# EAGLE board Rauchmelder_v3.9.0 (EAGLE 9.6.2)
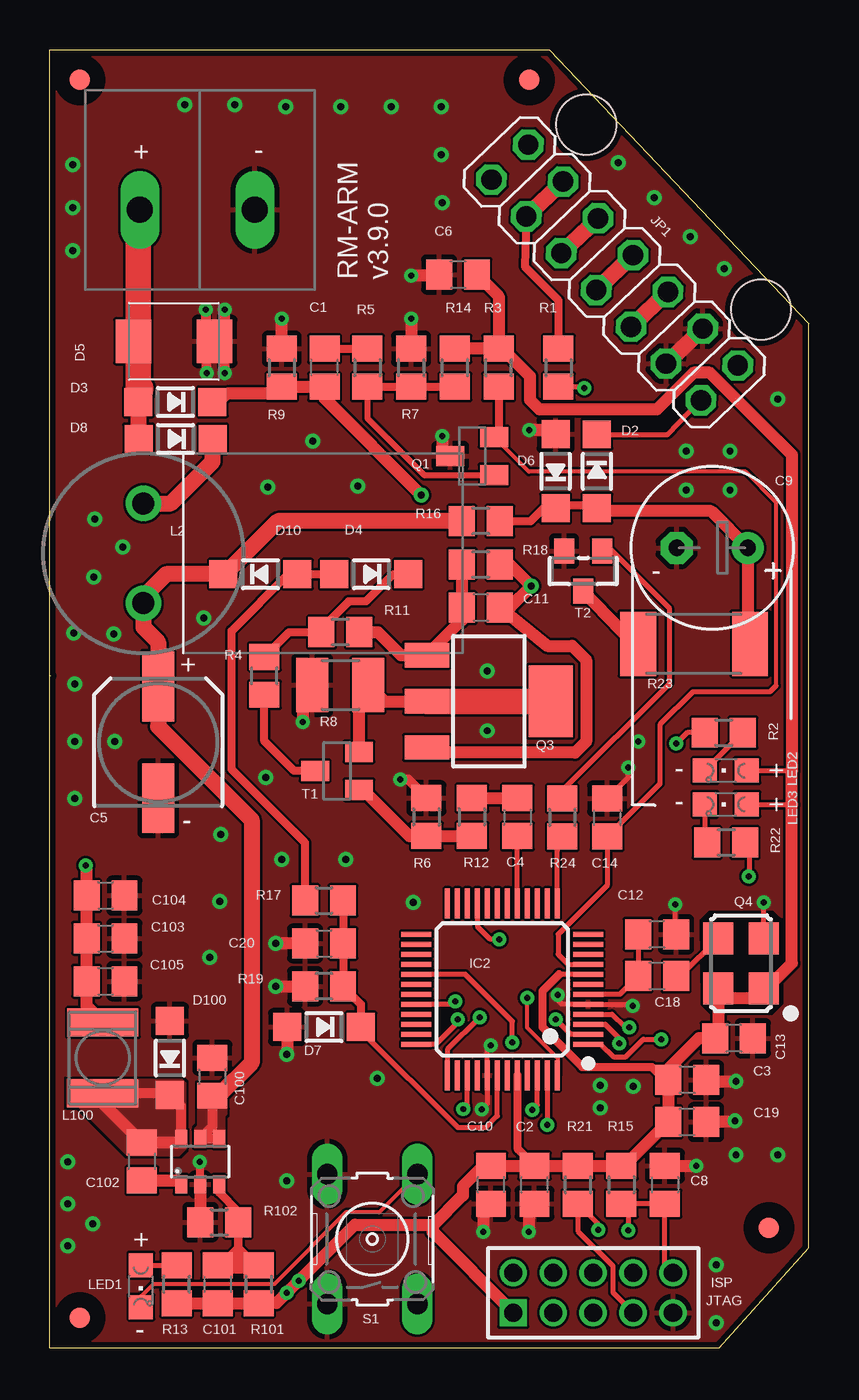
[diagram p0: board, top side]
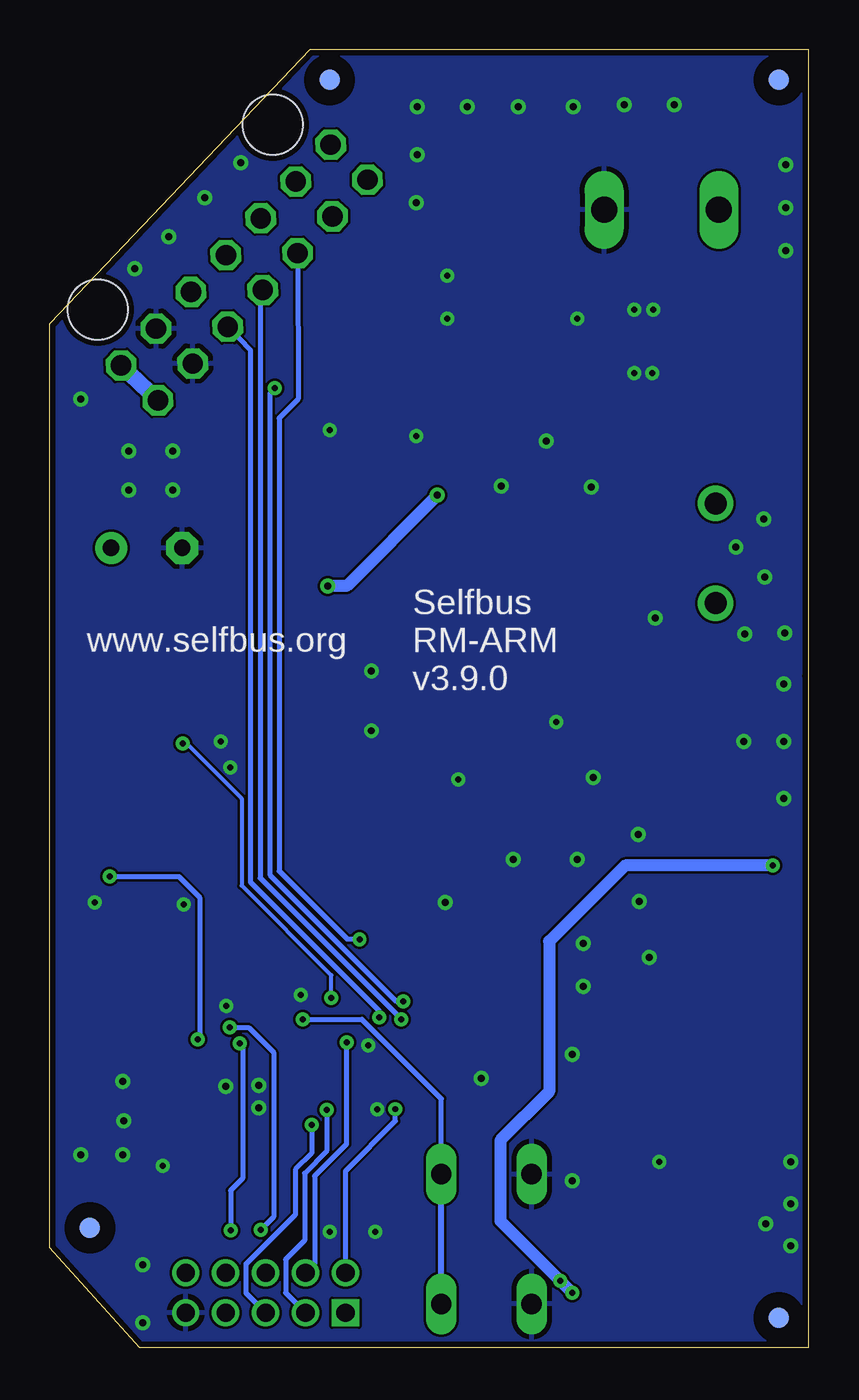
[diagram p1: board, bottom side, seen from below]

Size 38 x 65 mm. Coordinates in mm from the lower left corner, seen from the top.
Outline: 0,33.66 0.04,33.66
Outline: 0,0 0,65 25,65 38,51.3 38,5 33.5,0 0,0
Copper layers (1*16): Top 0.035mm / dielectric 1.5mm / Bottom 0.035mm
Design rules "aisler_2_layer_complex": minimum track width 0.125mm, minimum drill 0.2mm, track to track 0.125mm, track to pad 0.125mm, pad to pad 0.125mm, via to via 0.125mm, smd to smd 0.125mm, copper to edge 0.3mm, drill to drill 0.25mm, minimum pad ring 0.2mm, minimum via ring 0.2mm, stop-mask expansion 0mil, vias tented up to drill 0mil, thermal gap 10mil
Holes 3 mm at 26.85,61.25 35.6,52
tRestrict: area 32.5,16.7 to 36.7,21.9

## Footprints (pad centres in the part's own frame; a part is rotated, then mirrored left to right if it is on the bottom)
C0805 = smd 1.3 x 1.5: 1 -0.95,0; 2 0.95,0
SANYO-OSCON_SMD_C6 = smd 3.5 x 1.6: + 2.8,0; - -2.8,0
E3,5-8 = drill 0.813 pad 1.6: + -1.778,0 | drill 0.813 pad 1.6 octagon: - 1.778,0
SOD-123 = smd 1.4 x 1.4: A 1.85,0; C -1.85,0
SMBJ = smd 1.78 x 2.16: A 2.04,0; C -2.03,0
FID_040 = smd 1.016 x 1.016 bottom: FIDB 0,0 | smd 1.016 x 1.016: FIDT 0,0
LQFP48 = smd 1.5 x 0.25: 1 -4.3,2.75; 2 -4.3,2.25; 3 -4.3,1.75; 4 -4.3,1.25; 5 -4.3,0.75; 6 -4.3,0.25; 7 -4.3,-0.25; 8 -4.3,-0.75; 9 -4.3,-1.25; 10 -4.3,-1.75; 11 -4.3,-2.25; 12 -4.3,-2.75; 25 4.3,-2.75; 26 4.3,-2.25; 27 4.3,-1.75; 28 4.3,-1.25; 29 4.3,-0.75; 30 4.3,-0.25; 31 4.3,0.25; 32 4.3,0.75; 33 4.3,1.25; 34 4.3,1.75; 35 4.3,2.25; 36 4.3,2.75 | smd 0.25 x 1.5: 13 -2.75,-4.3; 14 -2.25,-4.3; 15 -1.75,-4.3; 16 -1.25,-4.3; 17 -0.75,-4.3; 18 -0.25,-4.3; 19 0.25,-4.3; 20 0.75,-4.3; 21 1.25,-4.3; 22 1.75,-4.3; 23 2.25,-4.3; 24 2.75,-4.3; 37 2.75,4.3; 38 2.25,4.3; 39 1.75,4.3; 40 1.25,4.3; 41 0.75,4.3; 42 0.25,4.3; 43 -0.25,4.3; 44 -0.75,4.3; 45 -1.25,4.3; 46 -1.75,4.3; 47 -2.25,4.3; 48 -2.75,4.3
SOT23-6 = smd 0.6 x 0.9: 1 -0.95,-1.15; 2 0,-1.15; 3 0.95,-1.15; 4 0.95,1.15; 5 0,1.15; 6 -0.95,1.15
2X07 = drill 1.016 octagon: 1 -7.62,-1.27; 2 -7.62,1.27; 3 -5.08,-1.27; 4 -5.08,1.27; 5 -2.54,-1.27; 6 -2.54,1.27; 7 0,-1.27; 8 0,1.27; 9 2.54,-1.27; 10 2.54,1.27; 11 5.08,-1.27; 12 5.08,1.27; 13 7.62,-1.27; 14 7.62,1.27
2X05M = drill 0.914 square: 1 -4,-1 | drill 0.914: 2 -4,1; 3 -2,-1; 4 -2,1; 5 0,-1; 6 0,1; 7 2,-1; 8 2,1; 9 4,-1; 10 4,1
11P-L1 = drill 1.1 pad 1.778: 1 -2.5,0; 2 2.5,0
L4532P = smd 1.397 x 3.556: 1 -1.778,0; 2 1.778,0
CHIPLED_0805 = smd 1.2 x 1.2: A 0,-1.05; C 0,1.05
SOT23-BEC = smd 1 x 1.4: B -0.95,-1.1; C 0,1.1; E 0.95,-1.1
SOT223 = smd 1.219 x 2.235: 1 -2.311,-3.099; 2 0,-3.099; 3 2.311,-3.099 | smd 3.6 x 2.2: 4 0,3.099
ASF = smd 1.6 x 1.5: 1 -1.25,-1.15; 2 1.25,-1.15; 3 1.25,1.15; 4 -1.25,1.15
R0805 = smd 1.3 x 1.5: 1 -0.95,0; 2 0.95,0
R1210 = smd 1.6 x 2.7: 1 -1.4,0; 2 1.4,0
R2512 = smd 1.8 x 3.2: 1 -2.8,0; 2 2.8,0
B3F-10XX = drill 1.016 long: 1 -3.251,2.261; 2 3.251,2.261; 3 -3.251,-2.261; 4 3.251,-2.261
SOT23 = smd 1 x 1.4: 1 -0.95,-1.1; 2 0.95,-1.1; 3 0,1.1
SOT23-WIDE = smd 1 x 1.27: 1 -0.95,-1; 2 0.95,-1; 3 0,1
BUSKLEMME243-724 = drill 1.3 long: 1 -2.875,0; 2 2.875,0

## Placement (x,y rotation side)
C1  100nF  [C0805]  13.75,49.08 90 top
C2  1uF  [C0805]  24.26,8.16 90 top
C3  100nF  [C0805]  31.91,13.41 180 top
C4  10nF  [C0805]  23.4,26.57 270 top
C5  100uF  [SANYO-OSCON_SMD_C6]  5.42,30.32 90 top
C6  100nF  [C0805]  20.43,53.75 0 top
C8  10nF  [C0805]  30.79,8.16 270 top
C9  330uF  [E3,5-8]  33.16,40.06 180 top
C10  100nF  [C0805]  22.08,8.16 90 top
C11  10nF  [C0805]  21.58,37.06 180 top
C12  220pF  [C0805]  30.4,20.7 180 top
C13  10nF  [C0805]  34.25,15.5 180 top
C14  100pF  [C0805]  27.9,26.55 270 top
C18  100pF  [C0805]  30.4,18.61 180 top
C19  1uF  [C0805]  31.9,11.3 180 top
C20  100nF  [C0805]  13.72,20.25 0 top
C100  4.7uF 50V  [C0805]  8.13,13.58 270 top
C101  470nF  [C0805]  8.4,3.18 270 top
C102  15nF  [C0805]  4.6,9.33 270 top
C103  47uF 10V  [C0805]  2.78,20.5 0 top
C104  100nF  [C0805]  2.78,22.65 0 top
C105  47uF 10V  [C0805]  2.78,18.35 0 top
D2  BAT46  [SOD-123]  27.39,43.9 270 top
D3  1N4148  [SOD-123]  6.28,47.37 180 top
D4  1N4148  [SOD-123]  16.09,38.74 180 top
D5  SMAJ40  [SMBJ]  6.21,50.4 0 top
D6  12V  [SOD-123]  25.32,43.9 90 top
D7  DDZ9685  [SOD-123]  13.72,16.06 180 top
D8  1N4148  [SOD-123]  6.29,45.51 180 top
D10  7V5  [SOD-123]  10.53,38.74 0 top
D100  RB060M-60  [SOD-123]  6.01,14.51 90 top
FD1  FID_40MIL  [FID_040]  1.5,63.5 0 top
FD2  FID_40MIL  [FID_040]  36,6 0 top
FD3  FID_40MIL  [FID_040]  24,63.5 0 top
FD4  FID_40MIL  [FID_040]  1.5,1.5 0 top
IC2  LPC1115  [LQFP48]  22.65,17.95 180 top
IC100  BD9G101  [SOT23-6]  7.52,9.32 0 top
JP1  [2X07]  28.27,53.85 133.5 top
JTAG  J  [2X05M]  27.2,2.75 0 top
L2  150mH  [11P-L1]  4.67,39.79 270 top
L100  4.7uH  [L4532P]  2.65,14.51 90 top
LED1  [CHIPLED_0805]  4.55,3.08 180 top
LED2  [CHIPLED_0805]  33.84,28.9 90 top
LED3  [CHIPLED_0805]  33.84,27.21 90 top
Q1  BC856  [SOT23-BEC]  21.14,44.66 90 top
Q3  BCP52  [SOT223]  21.97,32.38 270 top
Q4  ASFL  [ASF]  34.6,19.25 90 top
R1  10k  [R0805]  25.46,49.08 270 top
R2  1k  [R0805]  33.74,30.8 0 top
R3  10k  [R0805]  22.47,49.08 90 top
R4  2k2  [R0805]  10.73,33.65 90 top
R5  10k  [R0805]  15.89,49.08 270 top
R6  100k  [R0805]  18.85,26.57 270 top
R7  47k  [R0805]  18.08,49.08 270 top
R8  5R6 1210  [R1210]  14.53,33.19 0 top
R9  100k  [R0805]  11.61,49.08 270 top
R11  1k  [R0805]  14.54,35.84 180 top
R12  5k6  [R0805]  21.13,26.57 270 top
R13  1k  [R0805]  6.34,3.18 90 top
R14  82k  [R0805]  20.28,49.08 90 top
R15  100k  [R0805]  28.62,8.16 270 top
R16  22k  [R0805]  21.58,41.4 180 top
R17  43k  [R0805]  13.72,22.39 0 top
R18  1k  [R0805]  21.58,39.23 0 top
R19  6k2  [R0805]  13.72,18.1 180 top
R21  100k  [R0805]  26.44,8.16 90 top
R22  1k  [R0805]  33.86,25.3 180 top
R23  220R  [R2512]  32.25,35.25 180 top
R24  10k  [R0805]  25.65,26.55 270 top
R101  1k6  [R0805]  10.45,3.18 270 top
R102  470R  [R0805]  8.48,6.28 0 top
S1  [B3F-10XX]  16.14,5.44 90 top
T1  BC847C  [SOT23]  14.38,28.89 90 top
T2  BC817  [SOT23-WIDE]  26.7,38.9 180 top
U$1  EIB  [BUSKLEMME243-724]  7.38,56.99 180 top

## Library data of the parts
C1-C6 C8-C14 C18-C20 C100-C105 = rcl; SPICEPREFIX: C
D2-D4 D6 D8 D10 D100 IC2 T2 = microbuilder
D5 = diode
D7 = microbuilder; ALTERNATIVE: MMSZ4684T1G
FD1-FD4 = Fiducial
IC100 = Stefan_selfbus
JP1 = pinhead
JTAG = pinhead-2
L2 = RCL_for_Selfbus-Projects
L100 = rcl_changed; SPICEPREFIX: L
LED1-LED3 = led
Q1 Q3 = transistor-pnp
Q4 = crystal; MPN: ASFLM1-50.000MHZ-C-T; OC_FARNELL: 1838931; OC_NEWARK: 99M0411
R1-R9 R11-R19 R21-R24 R101 R102 = rcl; SPICEPREFIX: R
S1 = switch-omron
T1 = transistor
U$1 = con-wago

## Nets
+3V3: C2.2 C3.2 C6.2 C10.2 C13.2 C19.2 C101.2 C103.1 C104.1 C105.1 IC2.8 IC2.44 JTAG.1 L100.2 LED2.A LED3.A Q4.1 Q4.4 R3.2 R13.1 R14.2 R15.1 R21.2 R101.2
APROG: IC2.22
ARMINFO1: IC2.48 R2.1
ARMINFO2: IC2.1 R22.1
BST: C102.2 IC100.1
BUS_V1: C20.2 D7.C IC2.42 R17.2 R19.1
EIB+: D3.A D5.C D8.A U$1.2
EIB+DIR: C1.1 C11.1 D3.C Q3.3 R9.2 R18.2
EIB_DC: C5.+ C100.2 D10.C IC100.4 IC100.5 L2.2 R16.2
EIB_IN: C14.2 IC2.9 Q1.E R3.1
EIB_OUT: C4.2 IC2.17
FB1: C101.1 IC100.3 R101.1 R102.2
GND: C2.1 C3.1 C5.- C6.1 C8.1 C9.- C10.1 C12.1 C13.1 C14.1 C19.1 C20.1 C100.1 C103.2 C104.2 C105.2 D5.A D6.A D7.A D100.A IC2.5 IC2.41 IC100.2 JP1.3 JP1.4 JTAG.9 Q1.C Q4.2 R6.1 R7.1 R8.1 R9.1 R19.2 R102.1 S1.1 S1.2 T2.2 U$1.1
ID1: IC2.11
ID2: IC2.12
IO1: IC2.26
IO2: IC2.23
IO3: IC2.25
IO4: IC2.24
IO5: IC2.10
IO6: IC2.27
IO7: IC2.28
IO8: IC2.31
IO9: IC2.33
IO10: IC2.34
IO11: IC2.35
IO12: IC2.40
IO13: IC2.45
IO14: IC2.47 JTAG.5
IO15: IC2.46 JTAG.3
ISP_EN: IC2.4 JTAG.7 R21.1
LT1: IC2.13 R24.2
LT2: IC2.14
LT3: IC2.19
LT4: IC2.20
LT5: IC2.21 JP1.9 JP1.10
LT6: IC2.18
LT7: IC2.30
LT8: IC2.32 R1.2
LT9: IC2.38
LX: C102.1 D100.C IC100.6 L100.1
N$1: JP1.11 JP1.12 R1.1
N$2: Q1.B R5.2 R7.2 R14.1
N$3: LED3.C R22.2
N$4: C11.2 Q3.1 R11.1 R18.1
N$5: LED2.C R2.2
N$7: R23.2 T2.3
N$8: R24.1 T2.1
N$9: LED1.A R13.2
N$10: C9.+ D2.A D6.C R16.1 R23.1
N$13: D8.C L2.1
N$16: C1.2 R5.1
N$18: D2.C JP1.1 JP1.2
N$22: C4.1 R12.1
N$23: R4.1 T1.3
N$25: D4.C R4.2 R11.2
N$26: Q3.2 Q3.4 R8.2 T1.2
N$34: R6.2 R12.2 T1.1
N$35: C18.1 Q4.3
PROG: IC2.2 LED1.C S1.3 S1.4
PWM: IC2.43
REF: D4.A D10.A R17.1
RESET: C8.2 IC2.3 JTAG.10 R15.2
RXD: IC2.37 JP1.5 JP1.6
SCL: IC2.15
SDA: IC2.16
SWCLK: IC2.29 JTAG.4
SWDIO: IC2.39 JTAG.2
TXD: IC2.36 JP1.7 JP1.8
XTALIN: C12.2 C18.2 IC2.6

## Tracks (layer width: path | path; a pad name or v marks a point on that pad's centre or on a via)
+3V3  (via drill 0.3)
  Top 0.254: IC2.8 25.5,18.7 | 23.44,9.93 23.4,9.99 | LED2.A 37.15,28.9 | 37.15,27.2 37.14,27.21 LED3.A
  Top 0.406: IC2.44 23.4,9.99 | 23.44,9.93 C2.2 | C3.2 30.79,13.41 30.14,14.06 26.65,14.06 24.66,16.06 24.66,17.86 25.5,18.7
  Top 0.61: R13.1 C101.2 R101.2 10.47,2.24 11.35,2.24 v11.85,2.74 15.27,6.16 19.16,6.16 19.16,6.11 | 19.16,6.11 20.67,7.63 20.67,8.08 21.7,9.11 C10.2 C2.2 R21.2 R15.1 28.76,9.11 C19.2 C3.2 30.96,13.97 32.49,15.5 C13.2 33.45,15.65 Q4.4 33.95,17.5 35.25,17.5 Q4.1 35.9,18 37.15,19.25 37.15,27.2 37.15,28.9 37.15,44.72 33.04,48.83 32.23,48.83 30.4,47 24.51,47 24.03,47.48 24.03,48.66 22.65,50.03 R3.2 | 19.16,6.11 19.16,5.79 JTAG.1 | C6.2 22.47,52.66 R3.2 | L100.2 1.83,17.11 C105.1 C103.1 C104.1 1.83,24.12 v1.8,24.15 | R3.2 R14.2
  Bottom 0.61: v1.8,24.15 9.2,24.15 13,20.35 13,12.82 15.45,10.37 15.45,6.34 v12.45,3.34 v11.85,2.74
ARMINFO1  (via drill 0.3)
  Top 0.2: v23.91,17.51 23.91,16.01 25.43,14.49 25.43,13.68 IC2.48
  Top 0.254: R2.1 31.9,30.8 v31.35,30.25
  Bottom 0.2: v23.91,17.51 23.91,18.65 28.4,23.14 28.4,27.5 31.25,30.35 v31.35,30.25
ARMINFO2  (via drill 0.3)
  Top 0.254: R22.1 35.01,25.1 v35.01,23.61 v35,23.6 | v30.6,15.45 29.72,15.45 28.83,14.57 28.22,14.57 27.58,15.2 IC2.1
  Bottom 0.254: v30.6,15.45 30.5,15.55 30.5,22.55 31.55,23.6 v35,23.6
BST
  Top 0.61: C102.2 6.36,8.38 IC100.1
BUS_V1
  Top 0.254: IC2.42 22.4,11.6 21.82,11.02 20.43,11.02 15.57,15.88 D7.C
  Top 0.406: R17.2 C20.2 R19.1 15.57,17.2 D7.C
EIB+
  Top 0.813: D8.A 4.44,47.36 D3.A
  Top 1.27: U$1.2 4.43,56.91 4.43,50.65 D5.C 4.43,50.15 4.43,48.17 4.55,48.05 D3.A
EIB+DIR  (via drill 0.35)
  Top 0.61: Q3.3 19.14,29.8 26.3,29.8 26.85,30.35 26.85,34.45 26.15,35.15 24.89,35.15 C11.1 23.03,37.06 24.1,38.13 v24.1,38.15 23.02,39.23 R18.2 | D3.C 8.44,47.37 8.85,47.78 11.26,47.78 R9.2 C1.1 13.75,47.55 v18.6,42.7
  Bottom 0.61: v18.6,42.7 23.15,38.15 v24.1,38.15
EIB_DC
  Top 0.508: IC100.4 IC100.5 8.13,11.08 C100.2
  Top 0.813: R16.2 11.42,41.4 8.76,38.74 D10.C 5.82,38.74 4.67,37.59 L2.2 4.67,36.09 5.42,35.34 C5.+ 5.42,31.12 10.1,26.44 10.1,14.27 8.46,12.62 C100.2
  pour Top (no thermals): 7.4,13.25 7.4,11.1 7.25,10.95 7.25,10.05 8.75,10.05 8.75,11.6 8.85,11.7 8.85,13.25
EIB_IN
  Top 0.2: 36.35,33.15 36.35,42.35 34.83,43.87 23.98,43.87 Q1.E
  Top 0.254: IC2.9 25.95,19.2 25.45,19.7 25.45,20.7 27.9,23.15 C14.2 30.54,28.24 30.54,31.2 32.19,32.85 36.05,32.85 36.35,33.15
  Top 0.406: R3.1 22.47,45.83 Q1.E
EIB_OUT
  Top 0.254: IC2.17 23.4,25.17 C4.2
FB1
  Top 0.406: IC100.3 8.47,7.77 9.43,6.81 R102.2 | R101.1 10.3,4.13 9.43,5 R102.2 | R102.2 9.43,5.01 8.55,4.13 C101.1
  Top 1.016: C101.1 8.5,4.23 10.35,4.23 R101.1
GND  (via drill 0.3, 0.35)
  Top 0.254: v25.43,17.67 25.43,17.41 25.64,17.2 IC2.5 28.9,17.2 28.98,17.12 v29.18,17.12 | v21.62,11.94 21.9,12.23 IC2.41 21.9,14.98 v22.07,15.14 | C12.1 31.3,20.75 v31.3,22.2 | Q4.2 v35.75,22.3 | C14.1 28.97,28.57 v28.97,29.05
  Top 0.406: IC100.2 7.52,9.28 v7.5,9.3
  Top 0.508: v17.55,28.45 17.95,28.45 18.4,28 R6.1 | D5.A 7.8,50.85 v7.8,52 | D5.A 8.75,50.91 v8.75,52 | v7.85,48.8 7.85,50.01 D5.A | v8.75,48.8 8.75,49.9 D5.A
  Top 0.61: IC100.2 7.52,6.74 R102.1 | C6.1 19.44,53.7 v18.1,53.7 | C20.1 v11.3,20.25 | v11.3,18.1 R19.2 | R19.2 | C3.1 33,13.35 v34.35,13.35 | v34.3,11.35 34.25,11.3 C19.1 | C8.1 31.25,9.1 v32.35,9.1 | C10.1 21.7,6.53 v21.7,5.8 | R8.1 12.65,32.73 v12.65,31.35 | v18.1,51.55 18.1,50.06 R7.1 | R9.1 11.6,50.07 v11.6,51.55 | D6.A 24.97,45.95 v24,45.95 | v19.65,45.65 19.65,45.05 Q1.C | C2.1 23.98,6.48 v23.98,5.8 | D7.A 11.87,14.72 v11.85,14.7
  Top 0.813: JP1.4 JP1.3
  other vias: 21.9,33.9 2.25,41.5 2.2,38.6 13.15,45.4 10.9,43.1 3.65,40.1 19.6,59.75 6.75,62.25 1.15,59.25 9.25,62.25 11.8,62.15 1.25,27.5 1.25,30.35 1.25,33.25 1.2,35.8 3.25,30.35 1.15,54.95 1.15,57.1 19.65,57.35 28.45,59.35 30.25,57.6 32.05,55.65 33.75,54.05 18.2,22.3 16.4,13.5 10.8,28.55 21.9,30.9 31.85,44.9 34.05,44.9 36.45,47.5 14.8,24.45 7.7,36.55 3.2,35.75 27.55,13.15 29.2,13.1 27.55,12 34.05,42.95 29.45,30.35 14.55,62.15 17.1,62.15 19.6,62.15 0.9,9.3 0.9,5.1 0.9,7.2 8.55,25.7 34.35,9.65 36.45,9.65 2.15,6.2 11.6,24.45 8,19.55 8.5,22.35 15.4,43.15 31.85,42.95 11.85,8.35 33.35,1.25 33.35,4.15
  pour Bottom (rank 2): 33.5,0 0,0 0,65 25,65 38,51.3 38,5
  pour Top (rank 2): 33.5,0 0,0 0,65 25,65 38,51.3 38,5
IO14  (via drill 0.3)
  Top 0.254: IC2.47 v24.9,11.15
  Bottom 0.254: v24.9,11.15 24.9,9.74 25.71,8.93 25.71,6.66 28.19,4.18 28.19,2.74 JTAG.5
IO15  (via drill 0.3)
  Top 0.254: v24.15,11.9 24.4,12.15 IC2.46
  Bottom 0.254: v24.15,11.9 24.15,9.85 25.25,8.74 25.25,5.37 26.2,4.42 26.2,2.75 JTAG.3
ISP_EN  (via drill 0.3)
  Top 0.254: IC2.4 28.13,16.7 28.8,16.03 v29,16.03 | v27.45,5.9 27.45,6.2 R21.1 26.44,5.84 28.19,4.09 28.19,2.76 JTAG.7
  Bottom 0.254: v29,16.03 28.05,16.03 26.8,14.79 26.8,6.55 v27.45,5.9
LT1
  Top 0.254: IC2.13 25.4,24.88 R24.2
LT5  (via drill 0.3)
  Top 0.254: v22.5,20.45 22.05,20.45 21.4,21.1 IC2.21
  Top 0.813: JP1.9 JP1.10
  Bottom 0.254: JP1.10 25.58,47.5 26.53,46.55 26.53,23.88 23.1,20.45 v22.5,20.45
LT8  (via drill 0.3)
  Top 0.254: v20.3,17.35 20.15,17.2 IC2.32 | R1.2 26.66,48.13 v26.74,48.05
  Bottom 0.254: v26.74,48.05 26.99,47.8 26.99,23.69 20.65,17.35 v20.3,17.35
LX
  Top 0.508: IC100.6 6.57,12.1 D100.C 5.94,12.73 L100.1
  Top 0.61: L100.1 2.65,12.23 C102.1 6.38,10.28 IC100.6
  pour Top (no thermals): 0.85,13.45 6.6,13.45 6.8,13.25 6.8,9.95 6.45,9.6 3.9,9.6 1.45,12.05 0.85,12.05
N$1
  Top 0.406: R1.1 25.46,52.46 23.78,54.14 JP1.12
  Top 0.813: JP1.11 JP1.12
N$2
  Top 0.305: R5.2 15.89,46.56 18.75,43.7 Q1.B
  Top 0.406: R5.2 R7.2 R14.1
N$3
  Top 0.254: LED3.C 32.79,25.42 R22.2
N$4
  Top 0.61: R11.1 16.42,35.84 17.57,34.69 Q3.1 20.63,36.44 C11.2 R18.1
N$5
  Top 0.254: LED2.C R2.2
N$7
  Top 0.61: R23.2 29.25,35.25 T2.3
N$8
  Top 0.254: R24.1 25.65,27.9 31,33.25 31,37.05 28.05,40 T2.1
N$9
  Top 0.254: LED1.A R13.2
N$10
  Top 0.406: R16.1 24.06,41.4 24.87,42.2 D6.C 25.47,42.2 27.38,42.2 D2.A
  Top 0.61: D2.A 27.54,41.9 33.1,41.9 C9.+ 34.94,35.36 R23.1
N$13
  Top 0.813: L2.1 6.04,42.29 8.14,44.39 D8.C
N$16
  Top 0.406: C1.2 R5.1
N$18
  Top 0.254: D2.C 30.94,45.74 JP1.2
  Bottom 0.813: JP1.2 JP1.1
N$22
  Top 0.61: R12.1 C4.1
N$23
  Top 0.406: T1.3 12.23,28.89 10.73,30.39 R4.1
N$25
  Top 0.406: D4.C 17.19,38.74 15.83,37.37 14.96,37.37 13.43,35.84 | R11.2 13.43,35.84 | R4.2 11.97,35.84 13.43,35.84
N$26
  Top 0.61: T1.2 15.48,32.73 R8.2 16.74,32.38 Q3.2
  Top 1.27: Q3.2 Q3.4
N$34
  Top 0.61: R12.2 R6.2 17.99,25.62 15.58,28.04 T1.1
N$35
  Top 0.254: Q4.3 31.56,18.61 C18.1
PROG  (via drill 0.3)
  Top 0.2: 4.55,2.55 5.18,3.18 11.23,3.18 14.82,6.77 16.48,6.77 S1.4
  Top 0.254: IC2.2 26.08,15.7 v25.33,16.45 | 4.55,2.55 LED1.C
  Bottom 0.254: v25.33,16.45 22.38,16.45 18.4,12.47 S1.4
  Bottom 0.305: S1.3 S1.4
REF
  Top 0.406: D4.A D10.A 11.93,38.74 9.1,35.9 9.1,28.96 12.77,25.29 R17.1
RESET  (via drill 0.3)
  Top 0.254: IC2.3 27.8,16.2 28.5,15.5 v28.5,15.25 | JTAG.10 30.79,4.16 C8.2 R15.2 28.95,6.87 v28.95,5.87
  Bottom 0.254: v28.5,15.25 28.35,15.1 28.35,8.47 28.95,7.87 v28.95,5.87
RXD  (via drill 0.3)
  Top 0.254: v21.52,16.55 19.9,14.93 IC2.37
  Top 0.813: JP1.5 JP1.6
  Bottom 0.254: JP1.6 27.97,49.96 27.97,23.32 21.52,16.87 v21.52,16.55
SWCLK  (via drill 0.3)
  Top 0.254: v23.15,15.3 23.15,16.35 20.8,18.7 IC2.29
  Bottom 0.254: JTAG.4 24.75,4.2 24.75,8.6 23.15,10.2 v23.15,15.3
SWDIO  (via drill 0.3)
  Top 0.254: v20.7,11.95 20.9,12.15 IC2.39
  Bottom 0.254: JTAG.2 23.2,8.85 20.7,11.35 v20.7,11.95
TXD  (via drill 0.3)
  Top 0.254: v20.41,16.44 20.41,16.3 19.31,15.2 IC2.36
  Top 0.813: JP1.7 JP1.8
  Bottom 0.254: JP1.8 27.47,52.85 27.47,23.52 20.41,16.46 v20.41,16.44
XTALIN
  Top 0.254: IC2.6 28.54,17.7 C18.2 C12.2

## Text on the board
tPlace: + | - | RM-ARM / v3.9.0 | - | + | - | + | - | + | - | + | -
bPlace: www.selfbus.org | Selfbus / RM-ARM / v3.9.0
tNames: ISP